# EAGLE board one key (EAGLE 7.7.0)
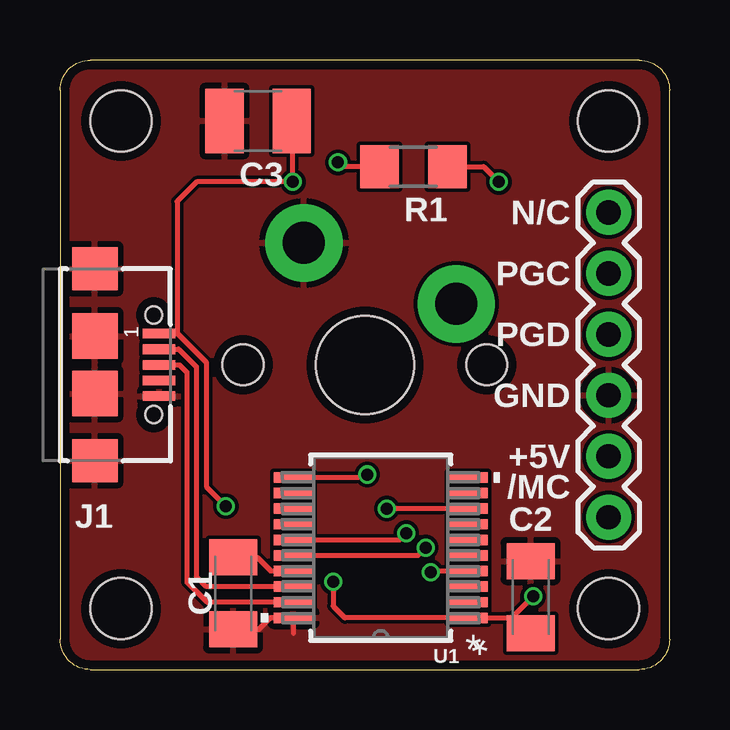
[diagram p0: board, top side]
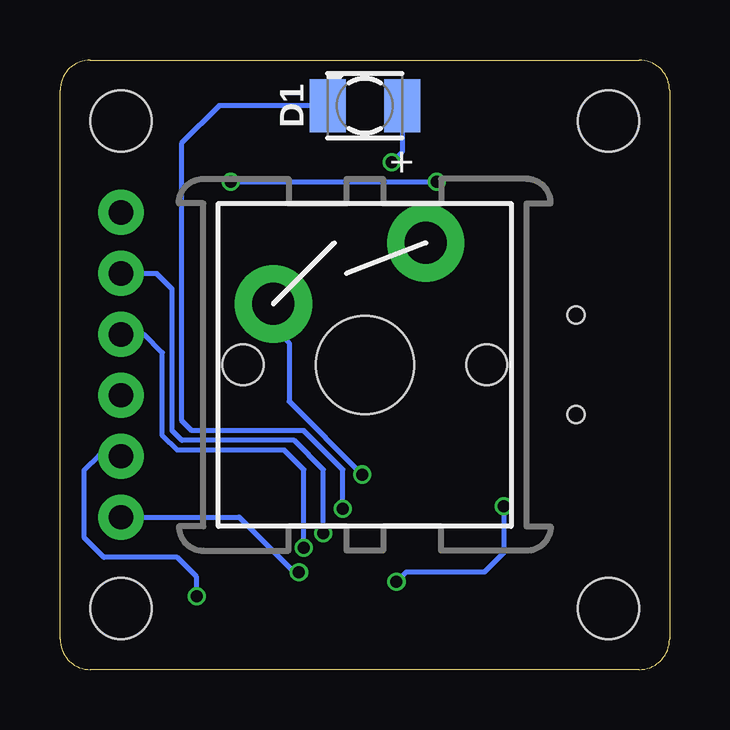
[diagram p1: board, bottom side, seen from below]

Size 25.4 x 25.4 mm. Coordinates in mm from the lower left corner, seen from the top.
Outline: 1.27,0 24.13,0 arc90 25.4,1.27 25.4,24.13 arc90 24.13,25.4 1.27,25.4 arc90 0,24.13 0,1.27 arc90 1.27,0
Copper layers (1*16): Top 0.035559375mm / dielectric 1.6mm / Bottom 0.035559375mm
Design rules "oshpark-2layer-2018": minimum track width 6mil, minimum drill 10mil, track to track 6mil, track to pad 6mil, pad to pad 6mil, via to via 6mil, smd to smd 6mil, copper to edge 15mil, drill to drill 6mil, minimum pad ring 5mil, minimum via ring 5mil, stop-mask expansion 2.5mil, vias tented up to drill 0mil, thermal gap 10mil
Holes 2.54 mm at 2.54,2.54 2.54,22.86 22.86,22.86 22.86,2.54

## Footprints (pad centres in the part's own frame; a part is rotated, then mirrored left to right if it is on the bottom)
C1206K = smd 1.5 x 2: 1 -1.5,0; 2 1.5,0
C1210 = smd 1.6 x 2.7: 1 -1.4,0; 2 1.4,0
KA-3528ASYC = smd 1.5 x 2.2: A -1.55,0; C 1.55,0
629105136821 = smd 0.4 x 1.35: 1 -1.3,2.675; 2 -0.65,2.675; 3 0,2.675; 4 0.65,2.675; 5 1.3,2.675 | smd 1.8 x 1.9: SHELL -4,0; SHELL3 4,0 | smd 1.9 x 1.9: SHELL1 -1.2,0; SHELL2 1.2,0 | hole 0.7: -2.075,2.45; 2.075,2.45
1X06 = drill 1.016 pad 1.88: 1 0,0; 2 2.54,0; 3 5.08,0; 4 7.62,0; 5 10.16,0; 6 12.7,0
R1206 = smd 1.6 x 1.803: 1 -1.422,0; 2 1.422,0
CHERRY-MX-NOLED = drill 1.753 pad 3.226: S1 -3.81,2.54; S2 2.54,5.08 | hole 4.089: 0,0 | hole 1.707: -5.08,0; 5.08,0
SSOP20_MC = smd 1.651 x 0.432: 1 -3.632,2.925; 2 -3.632,2.275; 3 -3.632,1.625; 4 -3.632,0.975; 5 -3.632,0.325; 6 -3.632,-0.325; 7 -3.632,-0.975; 8 -3.632,-1.625; 9 -3.632,-2.275; 10 -3.632,-2.925; 11 3.632,-2.925; 12 3.632,-2.275; 13 3.632,-1.625; 14 3.632,-0.975; 15 3.632,-0.325; 16 3.632,0.325; 17 3.632,0.975; 18 3.632,1.625; 19 3.632,2.275; 20 3.632,2.925

## Placement (x,y rotation side)
C1  0.47uF 50V  [C1206K]  7.21,3.17 270 top
C2  0.1uF 50V  [C1206K]  19.61,3.02 90 top
C3  1uF 16V X5R  [C1210]  8.26,22.86 180 top
D1  [KA-3528ASYC]  12.7,23.5 180 bottom
J1  [629105136821]  1.45,12.7 270 top
J2  [1X06]  22.86,6.35 90 top
R1  1k  [R1206]  14.73,20.95 0 top
S3  [CHERRY-MX-NOLED]  12.7,12.7 0 bottom
U1  PIC16F1459-I/SS  [SSOP20_MC]  13.36,5.08 180 top

## Library data of the parts
C1 = rcl; MFR: KEMET; MFR_PART_NO: C1206C474K5RACTU
C2 = rcl; MFR: KEMET; MFR_PART_NO: C1206S104M5RACTU
C3 = rcl; MFR: KEMET; MFR_PART_NO: C1210C105K4PACTU
D1 = led
J1 = InputOutputIO (rev18a)
J2 = SparkFun-Connectors
R1 = rcl; MFR: BOURNS; MFR_PART_NO: CR1206-JW-102ELF
S3 = SparkFun-Switches
U1 = pic16f1459-i-ss; MANUFACTURER_PART_NUMBER: PIC16F1459ISS; VENDOR: Microchip

## Nets
+5V: C2.1 C3.1 J1.1 J2.2 R1.2 U1.1
/MCLR: J2.1 U1.4
D+: J1.3 U1.19
D-: J1.2 U1.18
GND: C1.2 C2.2 C3.2 J1.5 J1.SHELL J1.SHELL1 J1.SHELL2 J1.SHELL3 J2.3 S3.S2 U1.20
N$3: D1.A R1.1
PGC: J2.5 U1.15
PGD: J2.4 U1.16
RB6: S3.S1 U1.11
RC6: D1.C U1.8
VUSB: C1.1 U1.17

## Tracks (layer width: path | path; a pad name or v marks a point on that pad's centre or on a via)
+5V  (via drill 0.5)
  Top 0.203: J1.1 4.9,14 | 4.9,14 6.1,12.8 6.1,7.62 v6.91,6.81 | v11.38,3.66 11.38,2.64 11.87,2.15 U1.1 18.98,2.15 | R1.2 17.65,20.95 v18.29,20.32 | 4.9,14 4.88,14.02 4.88,19.51 5.69,20.32 v9.7,20.32 9.7,22.81 C3.1 | 18.98,2.15 C2.1 | 18.98,2.15 18.98,2.31 v19.71,3.05
  Bottom 0.203: v18.29,20.32 v9.7,20.32 | v6.91,6.81 6.91,4.88 7.72,4.06 10.97,4.06 v11.38,3.66 | v19.71,3.05 19.71,3.86 20.52,4.67 23.57,4.67 24.38,5.49 24.38,8.33 23.77,8.94 22.91,8.94 J2.2
/MCLR  (via drill 0.5)
  Top 0.203: U1.4 15.48,4.11 v15.44,4.06
  Bottom 0.203: v15.44,4.06 15.65,4.06 17.93,6.35 J2.1
D+
  Top 0.203: J1.3 4.98,12.7 5.28,12.39 5.28,3.66 6.14,2.81 U1.19
D-
  Top 0.203: J1.2 4.94,13.35 5.69,12.6 5.69,3.86 6.09,3.46 U1.18
GND
  Top 0.203: C1.2 8.28,1.68 8.76,2.15 U1.20 9.73,1.5
  pour Top: 0,25.4 25.4,25.4 25.4,0 0,0
N$3  (via drill 0.5)
  Top 0.203: R1.1 11.76,20.95 v11.58,21.13
  Bottom 0.203: D1.A 11.15,21.57 v11.58,21.13
PGC  (via drill 0.5)
  Top 0.203: U1.15 14.14,5.41 v14.43,5.69
  Bottom 0.203: v14.43,5.69 14.43,8.33 15.65,9.55 20.32,9.55 20.73,9.96 20.73,15.85 21.39,16.51 J2.5
PGD  (via drill 0.5)
  Top 0.203: U1.16 14.91,4.75 v15.24,5.08
  Bottom 0.203: v15.24,5.08 15.24,8.33 16.05,9.14 20.52,9.14 21.13,9.75 21.13,13.21 21.89,13.97 J2.4
RB6  (via drill 0.5)
  Top 0.203: U1.11 12.68,8.01 v12.8,8.13
  Bottom 0.203: v12.8,8.13 15.85,11.18 15.85,13.61 16.51,14.28 S3.S1
RC6  (via drill 0.5)
  Top 0.203: U1.8 v13.62,6.71 v13.61,6.71
  Bottom 0.203: v13.61,6.71 13.61,8.33 15.24,9.96 19.91,9.96 20.32,10.36 20.32,21.95 18.77,23.5 D1.C
VUSB
  Top 0.203: C1.1 8.23,4.67 8.8,4.11 U1.17

## Text on the board
_tsilk: C3 | R1 | N/C | PGC | 1 | PGD | GND | +5V | /MC | J1 | C2 | C1 | U1 | *
_bsilk: D1 | +